# Altium PCB LPCB224R0.PcbDoc (part 2 of 2)
Units mm, origin at the board's own origin, x right, y up, seen from the top; angles counter-clockwise.
Board outline 139 x 166 mm, 4 copper layers (Top Layer, Internal Plane 1, Mid-Layer 1, Bottom Layer); 91 components, 73 nets, 403 pads, 171 vias.
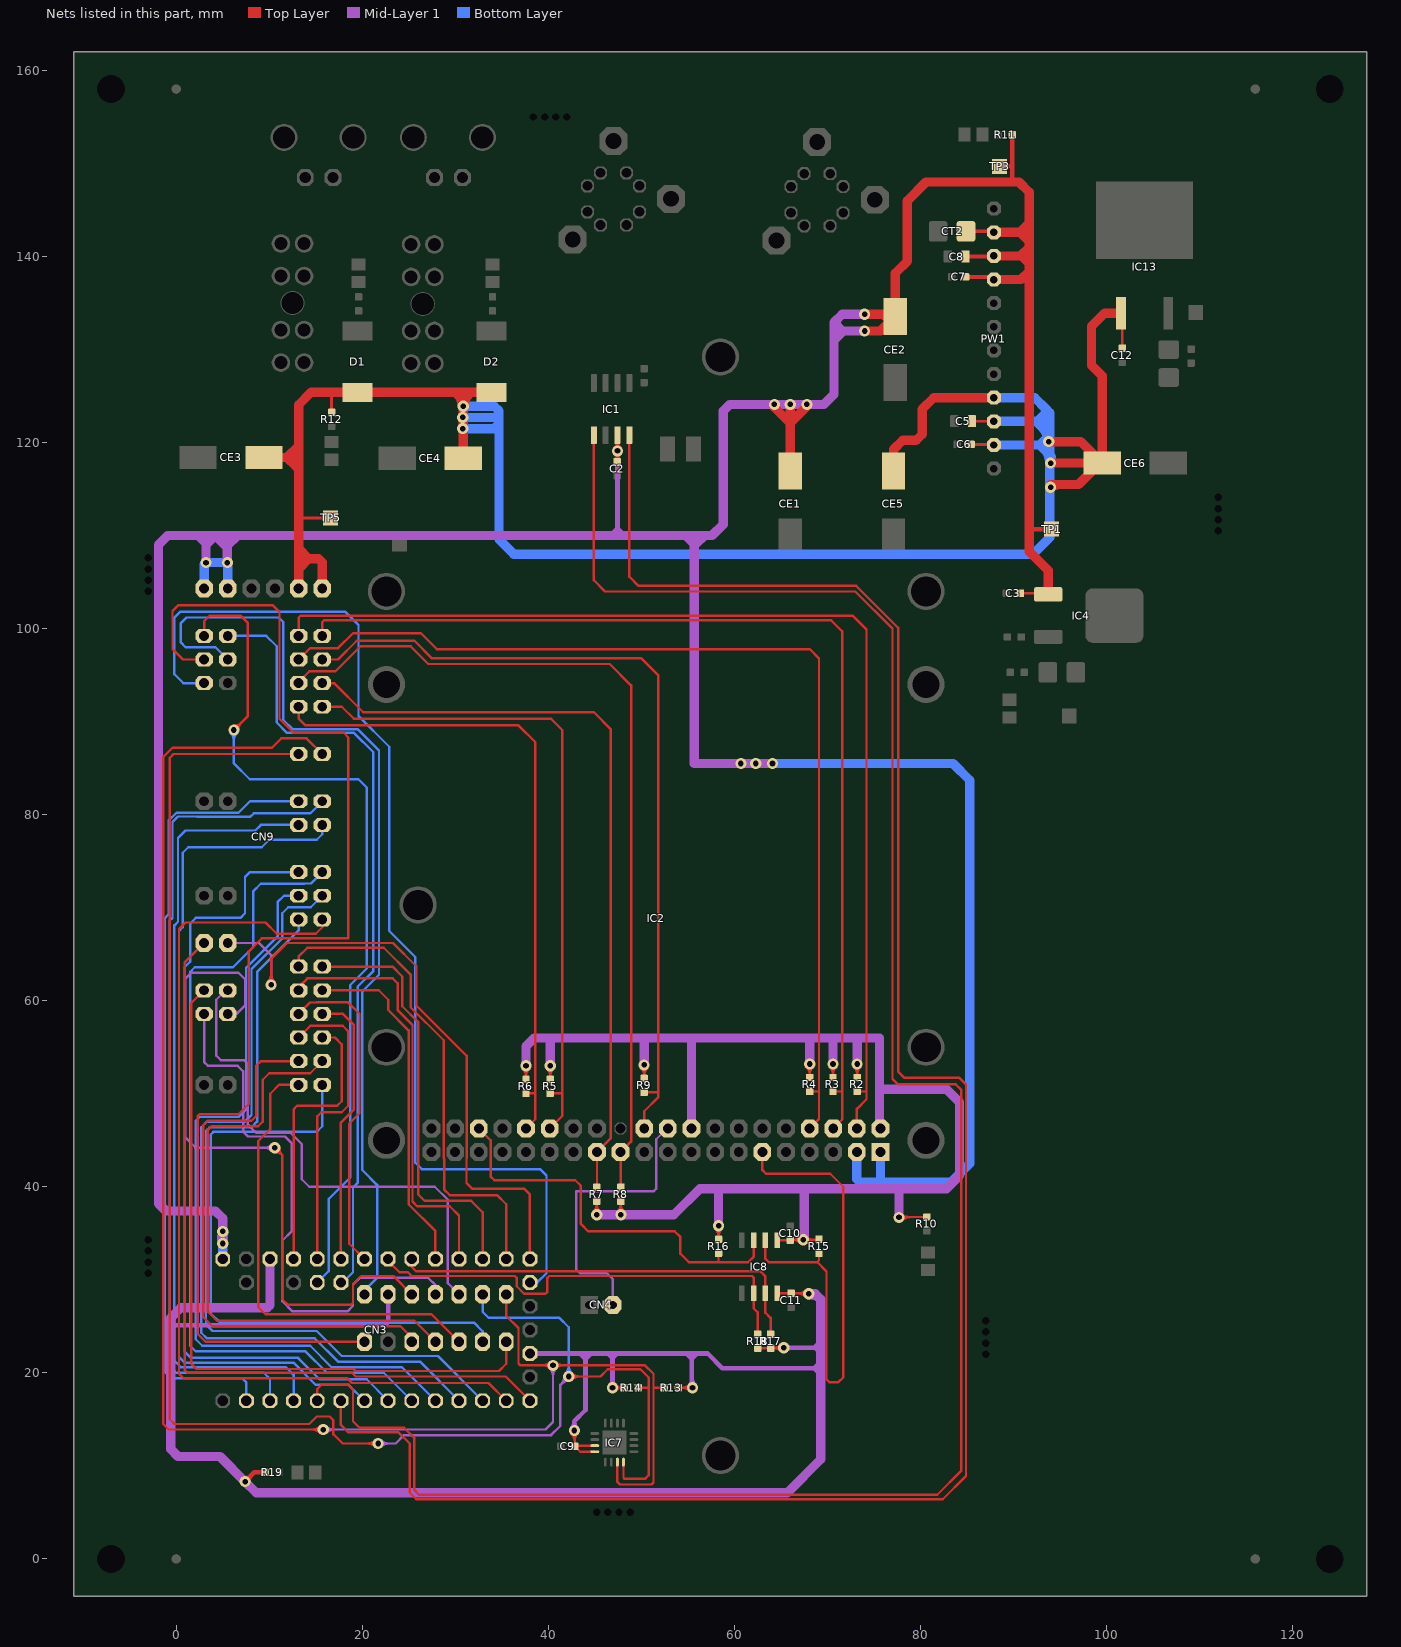
[diagram p4: the nets of this part, all layers, seen from the top]

## Via types
v1: diameter 1.2, hole 0.6, Top Layer to Bottom Layer, 171 vias

## Nets (pads, with @x,y where several pads share a name; then routed paths per layer and width w, separated by ;. In a path a pad name is that pad's centre, name@x,y a point inside that pad or via, vN(x,y) a via of type N, cw(c..) or ccw(c..) an arc to the next point about the centre after c; other vN are vias at no path point) (continued)
P5V: C2.1 C3.1 C7.1 C8.1 CE1.1 CE2.1 CN3.VIN CN9.P5V1 CN9.P5V2 CT2.1 IC1.3 IC2.2 IC2.4 IC4.1 PW1.9 PW1.10 PW1.11 R11.2 TP1.1 TP3.1 | length 480.3
  Top Layer w0.254: v1@47.101,119.439 ccw(c46.293,120.247) 47.435,120.247 ccw(c48.577,120.247) v1@47.769,119.439 ; v1@47.106,118.764 cw(c46.357,117.99) C2.1@47.435,117.99 ; C2.1@47.4,117.955 C2.1@47.435,117.99 ; IC1.3@47.435,120.805 v1(47.435,119.105) C2.1@47.435,117.99 ; v1@47.764,118.764 ccw(c48.513,117.99) C2.1@47.435,117.99
  Top Layer w0.3: C3.1@90.75,103.805 93.627,103.805 IC4.1@93.741,103.691
  Top Layer w0.4: C7.1@84.85,137.805 87.62,137.805 PW1.9@87.9,137.525 ; C8.1@84.85,140.005 87.84,140.005 PW1.10@87.9,140.065 ; CT2.1@84.9,142.705 87.8,142.705 PW1.11@87.9,142.605
  Top Layer w0.5: TP3.1@88.505,149.7 89.805,149.7 89.855,149.75 ; 89.8,148.005 89.855,148.059 89.855,149.75 ; R11.2@89.855,153.1 89.855,149.75 ; 91.66,140.065 91.7,140.065 ; 91.7,110.8 91.8,110.7 TP1.1@94.1,110.7 ; 91.7,146.905 91.891,147.095
  Top Layer w1: v1(64.3,124.1) 64.3,123.8 66,122.1 ; v1@64.4,124.1 ccw(c65.366,124.1) 64.683,123.417 ; CE1.1@66,116.955 66,122.1 ; v1(66,124.1) 66,122.1 ; v1(67.8,124.1) 67.8,123.9 66,122.1 ; v1(74,132) 75.7,132 CE2.1@77.255,133.555 ; v1(74,133.8) 76,133.8 76.245,133.555 CE2.1@77.255,133.555 ; PW1.9@87.9,137.525 90.82,137.525 91.7,138.405 ; PW1.10@87.9,140.065 90.76,140.065 ; PW1.11@87.9,142.605 90.7,142.605 ; IC4.1@93.741,103.691 93.741,106.259 91.7,108.3 91.7,110.8 91.7,138.405 ; CE2.1@77.255,133.555 CE2.1@77.3,133.555 77.3,138.2 78.6,139.5 78.6,146.005 80.6,148.005 89.8,148.005 90.6,148.005 91.7,146.905 91.7,143.605 ; 90.7,142.605 91.7,141.605 ; 90.7,142.605 91.6,142.605 91.7,142.505 ; 90.7,142.605 91.7,143.605 ; 90.76,140.065 90.89,140.065 ; 90.76,140.065 91.7,141.005 ; 90.89,140.065 91.66,140.065 91.7,140.105 ; 90.89,140.065 91.7,139.255 ; 91.7,138.405 91.7,139.255 ; 91.7,139.255 91.7,140.065 91.7,140.105 ; 91.7,140.105 91.7,141.005 ; 91.7,141.005 91.7,141.605 ; 91.7,141.605 91.7,142.505 ; 91.7,142.505 91.7,143.605
  Mid-Layer 1 w0.5: 46.6,110.005 46.67,110.005 47.435,110.77 ; v1@47.188,118.857 cw(c46.59,118.26) 47.435,118.26 cw(c48.28,118.26) v1@47.682,118.857 ; 47.4,110.005 47.435,110.04 47.435,110.77 ; v1(47.435,119.105) 47.435,110.77 ; 48.2,110.005 47.435,110.77
  Mid-Layer 1 w1: v1(3.2,107.105) 3.2,109.205 ; v1(5,33.905) v1(5,35.205) 5,36.605 4.2,37.405 -1.1,37.405 -1.9,38.205 -1.9,109.005 -0.9,110.005 2.4,110.005 ; v1(5.5,107.105) 5.5,108.905 ; 46.6,110.005 6.6,110.005 ; 46.67,110.005 47.4,110.005 48.2,110.005 54.8,110.005 ; v1(64.1,85.505) v1(62.3,85.505) v1(60.7,85.505) 55.7,85.505 55.7,109.005 ; v1(74,132) 71.7,132 ; v1(74,133.8) 71.6,133.8 70.7,132.9 ; 2.4,110.005 3.2,110.005 ; 2.4,110.005 3.2,109.205 ; 3.2,109.205 3.4,109.205 4.2,110.005 ; 3.2,109.205 3.2,110.005 ; 3.2,110.005 4.2,110.005 ; 4.2,110.005 5.3,108.905 5.5,108.905 ; 4.2,110.005 5.5,110.005 ; 5.5,108.905 6.6,110.005 ; 5.5,108.905 5.5,110.005 ; 5.5,110.005 6.6,110.005 ; 54.8,110.005 55.7,110.005 ; 54.8,110.005 55.7,109.105 ; 55.7,109.005 55.7,109.105 ; 55.7,109.005 55.8,109.005 56.8,110.005 ; 55.7,109.105 55.7,110.005 ; 55.7,110.005 56.8,110.005 ; 56.8,110.005 57.6,110.005 58.8,111.205 58.8,123.405 59.5,124.105 69.6,124.105 70.7,125.205 70.7,131 ; 70.7,131 70.7,131.9 ; 70.7,131 71.7,132 ; 70.7,131.9 70.7,132.9 ; 70.7,131.9 70.8,132 71.6,132 ; 70.7,132.9 71.6,132 ; 71.6,132 71.7,132
  Bottom Layer w1: CN9.P5V1@3,104.305 3,106.905 v1(3.2,107.105) 5.2,107.105 5.54,106.765 CN9.P5V2@5.54,104.305 ; 3,106.38 cw(c3.924,106.38) v1@3.271,107.034 ; CN3.VIN@5,32.24 5,34.905 v1@5.1,35.005 ; v1@5.074,33.972 cw(c5.63,34.475) v1@5.1,35.005 ; v1(60.7,85.505) v1(62.3,85.505) v1(64.1,85.505) 83.5,85.505 85.3,83.705 85.3,42.505 83.3,40.505 75.4,40.505 ; IC2.4@73.17,43.73 73.17,40.835 73.5,40.505 75.4,40.505 ; IC2.2@75.71,43.73 75.71,40.815 75.4,40.505
P24V: C5.1 C6.1 C12.1 CE3.1 CE4.1 CE5.1 CE6.1 CN9.P24V1 CN9.P24V2 D1.1 D2.1 IC13.1 PW1.2 PW1.3 PW1.4 R12.2 TP5.1 | length 276.8
  Top Layer w0.3: 13.16,111.905 TP5.1@16.6,111.905 ; R12.2@16.7,123.255 16.7,125.205 16.9,125.405 ; C6.1@85.45,119.805 87.84,119.805 PW1.2@87.9,119.745 ; C5.1@85.55,122.305 85.57,122.285 PW1.3@87.9,122.285 ; IC13.1@101.56,133.9 101.7,133.76 C12.1@101.7,130.15
  Top Layer w1: CE3.1@9.45,118.405 11.9,118.405 ; CN9.P24V1@13.16,104.305 13.16,106.405 ; 13.16,119.705 13.16,119.665 ; CN9.P24V2@15.7,104.305 15.7,107.105 15.3,107.505 14.26,107.505 ; 30.22,125.185 cw(c28.939,123.905) v1@30.75,123.905 ; CE4.1@30.85,118.305 v1(30.85,123.905) 30.85,124.555 ; v1@30.95,123.905 cw(c32.761,123.905) 31.48,125.185 ; D2.1@33.9,125.405 31.7,125.405 ; CE5.1@77.1,116.7 77.1,119.25 78.1,120.25 79.55,120.25 80.2,120.9 80.2,123.6 81.425,124.825 PW1.4@87.9,124.825 ; v1(93.8,120.1) 97.25,120.1 CE6.1@99.55,117.8 ; v1@94,115.5 97,115.5 CE6.1@99.3,117.8 ; v1(94,117.8) CE6.1@99.3,117.8 ; v1@94.071,115.129 cw(c94.966,114.234) 94.966,115.5 ; IC13.1@101.56,133.9 99.8,133.9 98.4,132.5 98.4,128.3 99.55,127.15 CE6.1@99.55,117.8 ; 11.9,118.405 12.9,117.405 13.16,117.405 ; 11.9,118.405 12.96,118.405 13.16,118.605 ; 11.9,118.405 13.16,119.665 ; 13.16,106.405 13.16,107.505 ; 13.16,106.405 14.26,107.505 ; 13.16,107.505 13.16,108.605 ; 13.16,107.505 14.26,107.505 ; 13.16,108.605 13.16,111.905 13.16,117.405 ; 13.16,108.605 14.26,107.505 ; 13.16,117.405 13.16,118.605 ; 13.16,118.605 13.16,119.665 ; 13.16,119.665 13.16,124.065 14.5,125.405 16.9,125.405 D1.1@19.5,125.405 30,125.405 ; 30,125.405 30.7,125.405 ; 30,125.405 30.85,124.555 ; 30.7,125.405 31.7,125.405 ; 30.7,125.405 30.85,125.255 30.85,124.555 ; 30.85,124.555 31.7,125.405 ; CE6.1@99.3,117.8 CE6.1@99.55,117.8
  Bottom Layer w1: v1(30.8,121.505) 34.2,121.505 34.7,122.005 ; v1(30.8,122.705) 34.7,122.705 ; v1(30.85,123.905) 34.2,123.905 34.7,123.405 34.7,122.005 ; PW1.2@87.9,119.745 92.84,119.745 ; PW1.3@87.9,122.285 92.5,122.285 ; PW1.4@87.9,124.825 92.28,124.825 93.5,123.605 ; 92.701,119.745 ccw(c92.701,121.199) v1@93.729,120.171 ; 93.06,121.644 cw(c91.516,120.1) v1@93.7,120.1 ; 93.26,119.344 cw(c91.716,117.8) v1@93.9,117.8 ; v1@93.776,120.003 ccw(c93.536,119.049) 92.84,119.745 ; v1@93.873,120.032 ccw(c94.578,119.382) 93.9,118.705 ; v1@93.925,117.866 ccw(c93.468,118.272) 93.9,118.705 ; 34.7,122.005 34.7,109.605 36.3,108.005 92.1,108.005 93.9,109.805 93.9,118.705 ; 92.5,122.205 92.58,122.285 ; 92.5,122.205 93.9,120.805 ; 92.5,122.205 92.5,122.285 ; 92.5,122.285 92.58,122.285 ; 92.58,122.285 93.88,122.285 93.9,122.305 ; 92.58,122.285 93.5,123.205 93.5,123.605 ; 92.84,119.745 ccw(c92.84,120.884) 93.723,120.163 cw(c92.84,120.884) 92.84,119.745 ; 92.84,119.745 92.86,119.745 ; 92.84,119.745 93.9,120.805 ; 92.86,119.745 ccw(c92.86,120.842) 93.722,120.162 cw(c92.86,120.842) 92.86,119.745 ; 92.86,119.745 93.74,119.745 v1@93.9,119.905 ; 92.86,119.745 93.9,118.705 ; 93.5,123.605 93.9,123.205 93.9,122.305 ; 93.9,118.705 v1@93.9,119.905 ; v1@93.9,119.905 93.9,120.805 ; 93.9,120.805 93.9,122.305
  other v1: 94,115.2
PI_D3V3: C10.1 IC2.1 IC2.17 IC8.1 R2.1 R3.1 R4.1 R5.1 R6.1 R7.1 R8.1 R9.1 R10.2 R15.2 R16.2 | length 187.5
  Top Layer w0.254: v1@37.266,52.67 cw(c36.458,51.863) 37.6,51.863 cw(c38.742,51.863) v1@37.934,52.67 ; R6.1@37.6,51.55 v1(37.6,53.005) ; v1@39.866,52.67 cw(c39.058,51.863) 40.2,51.863 cw(c41.342,51.863) v1@40.534,52.67 ; R5.1@40.2,51.55 v1(40.2,53.005) ; v1@44.866,37.33 ccw(c44.058,38.137) 45.2,38.137 ccw(c46.342,38.137) v1@45.534,37.33 ; v1(45.2,36.995) R7.1@45.2,38.45 ; v1@47.466,37.33 ccw(c46.658,38.137) 47.8,38.137 ccw(c48.942,38.137) v1@48.134,37.33 ; v1(47.8,36.995) R8.1@47.8,38.45 ; v1@49.966,52.77 cw(c49.158,51.963) 50.3,51.963 cw(c51.442,51.963) v1@50.634,52.77 ; R9.1@50.3,51.65 v1(50.3,53.105) ; v1@57.966,35.47 cw(c57.158,34.663) 58.3,34.663 cw(c59.442,34.663) v1@58.634,35.47 ; R16.2@58.3,34.355 v1(58.3,35.805) ; IC8.1@64.605,34.255 C10.1@66,34.255 66.05,34.305 v1(67.4,34.305) 69.05,34.305 R15.2@69.1,34.355 ; v1@67.066,33.97 ccw(c66.258,33.163) 66.258,34.305 ccw(c66.258,35.447) v1@67.066,34.639 ; v1@67.734,33.97 cw(c68.542,33.163) 68.542,34.305 cw(c68.542,35.447) v1@67.734,34.639 ; v1@67.766,52.87 cw(c66.958,52.063) 68.1,52.063 cw(c69.242,52.063) v1@68.434,52.87 ; R4.1@68.1,51.75 v1(68.1,53.205) ; v1@70.266,52.87 cw(c69.458,52.063) 70.6,52.063 cw(c71.742,52.063) v1@70.934,52.87 ; R3.1@70.6,51.75 v1(70.6,53.205) ; v1@72.866,52.87 cw(c72.058,52.063) 73.2,52.063 cw(c74.342,52.063) v1@73.534,52.87 ; R2.1@73.2,51.75 v1(73.2,53.205) ; v1(77.7,36.705) 77.75,36.755 R10.2@80.7,36.755 ; v1@77.855,36.55 cw(c78.349,36.055) 78.349,36.755 ; v1@78.034,36.37 cw(c78.963,35.442) 78.963,36.755 ; v1@78.034,37.039 ccw(c78.721,37.726) 78.721,36.755
  Mid-Layer 1 w1: v1(37.6,53.005) 37.6,55.105 38.5,56.005 40.2,56.005 ; v1(40.2,53.005) 40.2,56.005 ; v1(45.2,36.995) v1(47.8,36.995) 53.491,36.995 56.3,39.805 58.3,39.805 ; v1(50.3,53.105) 50.3,56.005 ; IC2.17@55.39,46.27 55.4,46.28 55.4,56.005 ; v1(58.3,35.805) 58.3,39.805 ; v1(67.4,34.305) 67.5,34.405 67.5,39.805 ; v1(68.1,53.205) 68.1,56.005 ; v1(70.6,53.205) 70.6,56.005 ; v1(73.2,53.205) 73.2,56.005 ; IC2.1@75.71,46.27 75.6,46.38 75.6,50.5 ; v1(77.7,36.705) 77.7,39.805 ; 40.2,56.005 50.3,56.005 ; 50.3,56.005 55.4,56.005 ; 55.4,56.005 68.1,56.005 ; 58.3,39.805 67.5,39.805 ; 67.5,39.805 77.7,39.805 ; 68.1,56.005 70.6,56.005 ; 70.6,56.005 73.2,56.005 ; 73.2,56.005 75.6,56.005 75.6,50.5 ; 75.6,50.5 82.8,50.5 84.2,49.1 84.2,41.205 82.8,39.805 77.7,39.805
PI_ID1: CN9.ID1 IC2.3 R2.2 | length 118.8
  Top Layer w0.254: CN9.ID1@13.16,99.225 13.16,101.165 13.4,101.405 72.7,101.405 74.2,99.905 74.2,50.205 ; IC2.3@73.17,46.27 73.17,48.375 74.2,49.405 74.2,50.205 ; R2.2@73.2,50.25 74.155,50.25 74.2,50.205
PI_ID2: CN9.ID2 IC2.5 R3.2 | length 112.8
  Top Layer w0.254: CN9.ID2@15.7,99.225 15.7,100.705 15.9,100.905 70.4,100.905 71.6,99.705 71.6,50.305 ; R3.2@70.6,50.25 71.545,50.25 71.6,50.305 ; IC2.5@70.63,46.27 71.6,47.24 71.6,50.305
PI_ID3: CN9.ID3 IC2.7 R4.2 | length 110.6
  Top Layer w0.254: CN9.ID3@13.16,96.685 13.18,96.685 14.4,97.905 17.4,97.905 19,99.505 26.3,99.505 28,97.805 ; 28.4,97.805 28,97.805 ; IC2.7@68.09,46.27 69.1,47.28 69.1,50.305 ; R4.2@68.1,50.25 69.045,50.25 69.1,50.305 ; 28,97.805 68.1,97.805 69.1,96.805 69.1,50.305
PI_ID4: CN9.ID4 IC2.29 R5.2 | length 71.5
  Top Layer w0.254: CN9.ID4@15.7,91.605 17.8,91.605 19.1,90.305 40.3,90.305 41.5,89.105 41.5,50.005 ; IC2.29@40.15,46.27 41.5,47.62 41.5,50.005 ; R5.2@40.2,50.05 41.455,50.05 41.5,50.005
PI_ID5: CN9.ID5 IC2.31 R6.2 | length 70.7
  Top Layer w0.254: CN9.ID5@13.16,91.605 13.16,90.345 13.9,89.605 36.8,89.605 38.6,87.805 38.6,50.005 ; R6.2@37.6,50.05 38.555,50.05 38.6,50.005 ; IC2.31@37.61,46.27 38.6,47.26 38.6,50.005
PI_ID6: CN9.ID6 IC2.26 R7.2 | length 82.9
  Top Layer w0.254: CN9.ID6@15.7,94.145 16.96,94.145 20.1,91.005 44.9,91.005 46.7,89.205 46.7,45.2 IC2.26@45.23,43.73 45.23,39.98 R7.2@45.2,39.95
PI_ID7: CN9.ID7 IC2.24 R8.2 | length 93.6
  Top Layer w0.254: CN9.ID7@13.16,94.145 13.16,94.265 14.3,95.405 17.1,95.405 19.8,98.105 25.2,98.105 27.1,96.205 46.6,96.205 48.9,93.905 48.9,44.86 IC2.24@47.77,43.73 47.77,39.98 R8.2@47.8,39.95
PI_ID8: CN9.ID8 IC2.21 R9.2 | length 89.3
  Top Layer w0.254: CN9.ID8@15.7,96.685 17.38,96.685 19.4,98.705 25.6,98.705 27.5,96.805 50,96.805 51.8,95.005 51.8,50.205 ; R9.2@50.3,50.15 51.745,50.15 51.8,50.205 ; IC2.21@50.31,46.27 50.31,48.115 51.8,49.605 51.8,50.205
PI_SCL: IC2.35 IC8.3 R16.1 | length 44.2
  Top Layer w0.254: IC2.35@32.53,46.27 33.8,45 33.8,41.105 34.2,40.705 42.9,40.705 43.5,40.105 43.5,36.005 44.3,35.205 53.6,35.205 54.2,34.605 54.2,32.805 55.1,31.905 58.3,31.905 ; R16.1@58.3,32.855 58.3,31.905 ; IC8.3@62.065,34.255 62.065,32.47 61.5,31.905 58.3,31.905
PI_SDA: IC2.12 IC8.2 R15.1 | length 55.7
  Top Layer w0.254: IC2.12@63.01,43.73 63.01,41.795 63.4,41.405 70.3,41.405 71.7,40.005 71.7,19.505 71.2,19.005 70.2,19.005 69.9,19.305 69.9,30.905 68.9,31.905 ; IC8.2@63.335,34.255 63.335,32.27 63.7,31.905 68.9,31.905 ; R15.1@69.1,32.855 69.1,32.105 68.9,31.905
T_D3V3: C9.1 C11.1 CN3.3V3_1 CN3.3V3_2 CN3.3V3_3 IC7.15 IC7.16 IC8.8 R13.2 R14.2 R17.2 R18.2 R19.2 | length 245.8
  Top Layer w0.254: v1@42.466,13.47 cw(c41.537,12.542) 42.85,12.542 ; v1@42.645,13.65 cw(c42.151,13.155) 42.85,13.155 ; v1(42.8,13.805) 42.85,13.755 C9.1@42.85,12.105 ; 42.85,12.783 cw(c43.821,12.783) v1@43.134,13.47 ; IC7.16@45,11.525 43.43,11.525 C9.1@42.85,12.105 ; IC7.15@45,12.175 42.92,12.175 C9.1@42.85,12.105 ; v1(46.9,18.405) R14.2@48.15,18.405 ; v1@47.234,18.07 cw(c48.042,17.263) 48.042,18.405 cw(c48.042,19.547) v1@47.234,18.739 ; R13.2@53.95,18.405 v1(55.5,18.405) ; v1@55.166,18.07 ccw(c54.358,17.263) 54.358,18.405 ccw(c54.358,19.547) v1@55.166,18.739 ; R18.2@62.5,22.655 R17.2@63.9,22.655 v1@65.3,22.655 ; R17.2@64.037,22.655 ccw(c64.037,23.967) v1@64.966,23.039 ; R17.2@64.279,22.655 cw(c64.279,21.683) v1@64.966,22.37 ; IC8.8@64.605,28.555 C11.1@66.1,28.555 67.45,28.555 v1@67.6,28.405 ; 64.651,22.655 ccw(c64.651,23.354) v1@65.145,22.859 ; 66.737,28.555 cw(c66.737,27.242) v1@67.666,28.17 ; 66.979,28.555 ccw(c66.979,29.526) v1@67.666,28.839 ; 67.351,28.555 cw(c67.351,27.855) v1@67.845,28.35
  Top Layer w0.5: v1(7.4,8.305) 8.4,9.305 R19.2@9.55,9.305 ; v1@7.4,8.655 ccw(c7.4,9.5) 7.997,8.902 ccw(c8.595,8.305) v1@7.75,8.305
  Mid-Layer 1 w0.5: -0.6,25.205 -0.5,25.105 22.4,25.105 22.78,25.485 CN3.3V3_3@22.78,28.43 ; CN3.3V3_2@38.02,22.08 43.4,22.08 ; v1@42.553,14.052 ccw(c41.955,14.65) 42.8,14.65 ccw(c43.645,14.65) v1@43.047,14.052 ; v1(42.8,13.805) 42.8,14.805 44,16.005 44,21.48 ; v1@46.653,18.652 ccw(c46.055,19.25) 46.9,19.25 ccw(c47.745,19.25) v1@47.147,18.652 ; v1(46.9,18.405) 46.9,21.58 ; v1@55.253,18.652 ccw(c54.896,19.008) 55.4,19.008 ; 55.4,19.491 ccw(c56.586,19.491) v1@55.747,18.652 ; v1(55.5,18.405) 55.4,18.505 55.4,21.505 ; v1(65.3,22.705) 68.6,22.705 ; v1@65.547,22.457 cw(c66.145,21.86) 66.145,22.705 cw(c66.145,23.55) v1@65.547,22.952 ; 69.3,19.805 68.6,20.505 ; 69.3,20.505 68.6,20.505 ; 69.3,21.205 68.6,20.505 ; 69.3,22.105 68.7,22.705 ; 69.3,22.705 68.7,22.705 ; 69.3,23.405 68.6,22.705 ; 43.4,22.08 44,22.08 ; 43.4,22.08 44,21.48 ; 44,21.48 44,22.08 ; 44,21.48 44.6,22.08 ; 44,22.08 44.6,22.08 ; 44.6,22.08 46.4,22.08 ; 46.4,22.08 46.9,22.08 ; 46.4,22.08 46.9,21.58 ; 46.9,21.58 47.4,22.08 ; 46.9,21.58 46.9,22.08 ; 46.9,22.08 47.4,22.08 ; 47.4,22.08 54.825,22.08 ; 54.825,22.08 55.4,22.08 ; 54.825,22.08 55.4,21.505 ; 55.4,21.505 55.425,21.505 56,22.08 ; 55.4,21.505 55.4,22.08 ; 55.4,22.08 56,22.08 ; 56,22.08 57.125,22.08 58.7,20.505 68.6,20.505 ; 68.6,22.705 68.7,22.705
  Mid-Layer 1 w1: CN3.3V3_1@10.08,32.24 10.08,27.285 9.8,27.005 0.5,27.005 -0.6,25.905 -0.6,25.205 -0.6,11.805 0.2,11.005 4.7,11.005 v1(7.4,8.305) 8.6,7.105 65.7,7.105 69.3,10.705 69.3,19.805 69.3,20.505 69.3,21.205 69.3,22.105 69.3,22.705 69.3,23.405 69.3,27.905 ; v1(68,28.505) 68.7,28.505 69.3,27.905 ; v1@68.005,28.405 cw(c68.088,26.693) 69.3,27.905
TEENSY_A10: CN3.A10 CN9.A10 | length 97
  Top Layer w0.254: CN9.A10@3,99.225 3,100.805 3.6,101.405 6.9,101.405 7.7,100.605 7.7,90.605 v1(6.2,89.105) ; v1@6.2,89.578 ccw(c6.2,90.72) 7.007,89.912 ccw(c7.815,89.105) v1@6.673,89.105
  Bottom Layer w0.254: v1@5.866,88.77 cw(c5.058,87.963) 6.2,87.963 cw(c7.342,87.963) v1@6.534,88.77 ; v1(6.2,89.105) 6.2,85.505 7.9,83.805 19.6,83.805 20.5,82.905 20.5,63.5 18.7,61.7 18.7,41.005 16.4,38.705 16.4,30.94 CN3.A10@15.16,29.7
TEENSY_A11: CN3.A11 CN9.A11 | length 84.2
  Bottom Layer w0.254: CN9.A11@5.54,99.225 9.68,99.225 10.8,98.105 10.8,89.905 11.914,88.791 19.114,88.791 21.2,86.705 21.2,63.2 19.5,61.5 19.5,40.405 19,39.905 19,30.805 17.895,29.7 CN3.A11@17.7,29.7
TEENSY_A12: CN3.A12 CN9.A12 | length 136.7
  Top Layer w0.254: CN9.A12@3,96.685 0.72,96.685 -0.4,97.805 -0.4,101.905 0.2,102.505 10.4,102.505 11.1,101.805 11.1,90.305 12.6,88.805 18,88.805 18.5,88.305 18.5,66.705 9.2,66.705 7.8,65.305 7.8,48.905 6.7,47.805 2.5,47.805 2.3,47.605 2.3,24.205 3.155,23.35 CN3.A12@20.24,23.35
TEENSY_A13: CN3.A13 CN9.A13 | length 102
  Bottom Layer w0.254: CN9.A13@5.54,96.685 4.22,98.005 3.615,98.005 3.595,97.985 1.02,97.985 0.5,98.505 0.5,100.605 1.1,101.205 11,101.205 11.5,100.705 11.5,90.205 12.5,89.205 19.5,89.205 21.8,86.905 21.8,62.8 20,61 20,41.805 21.6,40.205 21.6,30.205 20.24,28.845 CN3.A13@20.24,28.43
TEENSY_A14: CN3.A14 CN9.A14 | length 118
  Bottom Layer w0.254: CN9.A14@3,94.145 0.76,94.145 -0.2,95.105 -0.2,101.205 0.4,101.805 18.2,101.805 19.6,100.405 19.6,90.605 22.9,87.305 22.9,67.505 25.7,64.705 25.7,42.605 26.4,41.905 39.1,41.905 39.8,41.205 39.8,30.705 38.795,29.7 CN3.A14@38.02,29.7
TEENSY_CAN_RX: CN3.4 IC1.4 | length 221.3
  Top Layer w0.254: CN3.4@17.7,17 17.7,14.405 18.5,13.605 23.9,13.605 25.1,12.405 25.1,7.105 25.8,6.405 82.4,6.405 84.9,8.905 84.9,51.005 84.2,51.705 78.3,51.705 77.6,52.405 77.6,100.1 73.1,104.6 49.7,104.6 48.705,105.595 IC1.4@48.705,120.805
TEENSY_CAN_TX: CN3.3 IC1.1 | length 229
  Top Layer w0.254: CN3.3@15.16,17 15.16,18.265 15.6,18.705 18.5,18.705 19,18.205 19,14.805 19.7,14.105 24.5,14.105 25.6,13.005 25.6,7.405 26.1,6.905 81.8,6.905 84.4,9.505 84.4,50.405 83.8,51.005 77.6,51.005 77,51.605 77,100 73,104 46.1,104 44.895,105.205 IC1.1@44.895,120.805
TEENSY_PROG: CN4.2 IC2.19 | length 31.3
  Mid-Layer 1 w0.254: CN4.2@46.94,27.3 46.94,30.065 46.3,30.705 43.4,30.705 43,31.105 43,39.505 51.3,39.505 51.6,39.805 51.6,45.105 52.765,46.27 IC2.19@52.85,46.27
TEENSY_SCL: CN3.29 CN9.SCL IC7.3 R13.1 | length 189.9
  Top Layer w0.254: v1@15.466,13.57 ccw(c14.658,12.763) 14.658,13.905 ccw(c14.658,15.047) v1@15.466,14.239 ; CN9.SCL@15.7,86.525 14.02,88.205 11.3,88.205 10.3,87.205 -0.4,87.205 -1.4,86.205 -1.4,14.505 -0.8,13.905 v1(15.8,13.905) ; CN3.29@35.48,28.43 35.48,26.125 36.8,24.805 36.8,21.005 37,20.805 50.4,20.805 51.3,19.905 51.3,18.405 ; v1@40.166,20.47 ccw(c39.358,19.663) 39.358,20.805 ccw(c39.358,21.947) v1@40.166,21.139 ; v1@40.834,20.47 cw(c41.642,19.663) 41.642,20.805 cw(c41.642,21.947) v1@40.834,21.139 ; IC7.3@47.425,10.4 47.425,8.28 47.7,8.005 51.1,8.005 51.3,8.205 51.3,18.405 ; R13.1@52.45,18.405 51.3,18.405
  Mid-Layer 1 w0.254: v1(15.8,13.905) 39.7,13.905 40.5,14.705 v1@40.5,20.905 ; v1@16.134,13.57 cw(c16.942,12.763) 16.942,13.905 cw(c16.942,15.047) v1@16.134,14.239 ; v1@40.166,20.47 cw(c39.358,19.663) 40.5,19.663 cw(c41.642,19.663) v1@40.834,20.47
  other v1: 40.5,20.805
TEENSY_SCL1: CN3.19 IC8.6 R18.1 | length 49.5
  Top Layer w0.254: CN3.19@22.78,32.24 22.78,32.025 24,30.805 24.9,30.805 25.3,30.405 36.4,30.405 36.6,30.205 36.6,29.305 37.4,28.505 39.7,28.505 39.9,28.705 39.9,30.205 40.1,30.405 61.9,30.405 62.065,30.24 62.065,29.64 IC8.6@62.065,28.555 62.065,26.94 62.5,26.505 R18.1@62.5,24.155
TEENSY_SDA: CN3.30 CN9.SDA IC7.4 R14.1 | length 187.8
  Top Layer w0.254: CN9.SDA@13.16,86.525 -0.28,86.525 -0.7,86.105 -0.7,15.005 -0.2,14.505 14.3,14.505 15.1,15.305 16.5,15.305 16.9,14.905 16.9,13.405 17.9,12.405 v1(21.7,12.405) ; v1@21.366,12.07 ccw(c20.558,11.263) 20.558,12.405 ccw(c20.558,13.547) v1@21.366,12.739 ; v1(42.2,19.605) 45.6,19.605 46.386,20.391 49.914,20.391 50.8,19.505 50.8,18.405 ; v1@42.534,19.27 cw(c43.342,18.463) 43.342,19.605 cw(c43.342,20.747) v1@42.534,19.939 ; IC7.4@48.075,10.4 48.075,8.73 48.2,8.605 50.4,8.605 50.8,9.005 50.8,18.405 ; R14.1@49.65,18.405 50.8,18.405
  Mid-Layer 1 w0.254: v1(21.7,12.405) 23.6,12.405 24.5,13.305 40.3,13.305 41.3,14.305 41.3,18.705 v1(42.2,19.605) ; v1@22.034,12.07 cw(c22.842,11.263) 22.842,12.405 cw(c22.842,13.547) v1@22.034,12.739 ; v1@41.727,19.605 cw(c40.585,19.605) 41.393,18.797 cw(c42.2,17.99) v1@42.2,19.132
  Bottom Layer w0.254: CN3.30@32.94,28.43 32.94,26.565 33.6,25.905 41.2,25.905 42.2,24.905 v1(42.2,19.605) ; v1@41.866,19.939 ccw(c41.058,20.747) 42.2,20.747 ccw(c43.342,20.747) v1@42.534,19.939
TEENSY_SDA1: CN3.18 IC8.7 R17.1 | length 45.7
  Top Layer w0.254: CN3.18@25.32,32.24 25.32,31.385 25.8,30.905 62.8,30.905 62.9,30.805 63.335,30.37 IC8.7@63.335,28.555 63.335,26.47 63.9,25.905 R17.1@63.9,24.155
TEENSY_T0: CN3.0 CN9.T0 | length 85.5
  Bottom Layer w0.254: CN3.0@7.54,17 7.54,18.965 7.1,19.405 -0.5,19.405 -1.2,20.105 -1.2,68.905 -0.814,69.291 -0.814,79.376 0.029,80.219 2.391,80.219 2.405,80.205 6.701,80.205 7.94,81.445 CN9.T0@13.16,81.445
TEENSY_T1: CN3.1 CN9.T1 | length 89.3
  Bottom Layer w0.254: CN3.1@10.08,17 10.08,19.325 9.4,20.005 0,20.005 -0.7,20.705 -0.7,68.605 -0.4,68.905 -0.4,79.205 0.2,79.805 2.22,79.805 2.233,79.791 7.987,79.791 8.34,80.144 14.4,80.144 CN9.T1@15.7,81.445
TEENSY_T2: CN3.2 CN9.T2 | length 86.1
  Bottom Layer w0.254: CN3.2@12.62,17 12.62,19.785 11.8,20.605 0.5,20.605 -0.2,21.305 -0.2,68.105 0.186,68.491 0.186,77.491 1,78.305 8.5,78.305 9.1,78.905 CN9.T2@13.16,78.905
TEENSY_T5: CN3.5 CN9.T5 | length 93.1
  Bottom Layer w0.254: CN9.T5@15.7,78.905 15.7,77.905 15.1,77.305 10,77.305 9.2,76.505 1.3,76.505 0.7,75.905 0.7,67.905 0.3,67.505 0.3,21.705 0.9,21.105 12.6,21.105 15,18.705 18.535,18.705 CN3.5@20.24,17
TEENSY_T6: CN3.6 CN9.T6 | length 86.6
  Bottom Layer w0.254: CN9.T6@13.16,73.825 7.92,73.825 7.4,73.305 7.4,69.405 6.9,68.905 2.1,68.905 1.5,68.305 1.5,64.205 0.9,63.605 0.9,22.305 1.6,21.605 13.1,21.605 15.4,19.305 20.475,19.305 CN3.6@22.78,17
TEENSY_T7: CN3.7 CN9.T7 | length 88.6
  Bottom Layer w0.254: CN9.T7@15.7,73.825 14.48,72.605 13.775,72.605 13.755,72.585 9.081,72.585 8.3,71.805 8.3,65.805 6.1,63.605 2,63.605 1.5,63.105 1.5,22.905 2.1,22.305 13.9,22.305 16.2,20.005 22.315,20.005 CN3.7@25.32,17
TEENSY_T8: CN3.8 CN9.T8 | length 84.1
  Bottom Layer w0.254: CN9.T8@13.16,71.285 11.58,71.285 10.9,70.605 10.9,66.905 7.5,63.505 7.5,48.305 6.7,47.505 2.5,47.505 2.1,47.105 2.1,23.605 2.8,22.905 14.4,22.905 16.7,20.605 24.255,20.605 CN3.8@27.86,17
TEENSY_T9: CN3.9 CN9.T9 | length 86.9
  Bottom Layer w0.254: CN9.T9@15.7,71.285 14.461,70.045 12.041,70.045 11.4,69.405 11.4,66.705 8.1,63.405 8.1,47.705 7.4,47.005 3.3,47.005 2.7,46.405 2.7,24.305 3.3,23.705 14.9,23.705 17.4,21.205 26.195,21.205 CN3.9@30.4,17
TEENSY_T10: CN3.10 CN9.T10 | length 83.4
  Bottom Layer w0.254: CN9.T10@13.16,68.745 13.16,67.565 8.7,63.105 8.7,47.005 8.1,46.405 3.6,46.405 3.2,46.005 3.2,25.205 3.9,24.505 15.1,24.505 17.8,21.805 28.135,21.805 CN3.10@32.94,17
TEENSY_T11: CN3.11 CN9.T11 | length 101.5
  Top Layer w0.254: CN9.T11@15.7,68.745 15.7,67.905 15,67.205 10.8,67.205 9.6,68.405 1,68.405 0.3,67.705 0.3,19.905 0.8,19.405 18.4,19.405 18.9,18.905 33.575,18.905 CN3.11@35.48,17
TEENSY_T12: CN3.12 CN9.T12 | length 85.3
  Top Layer w0.254: CN9.T12@3,66.205 0.9,64.105 0.9,20.305 1.2,20.005 18.9,20.005 19.3,19.605 35.415,19.605 CN3.12@38.02,17
TEENSY_T13: CN3.13 CN9.T13 | length 72
  Top Layer w0.254: v1@9.866,62.039 ccw(c9.058,62.847) 10.2,62.847 ccw(c11.342,62.847) v1@10.534,62.039 ; v1(10.2,61.705) 10.2,64.505 11.9,66.205 23.3,66.205 25.8,63.705 25.8,59.5 31.229,54.071 31.229,43.105 31.2,43.076 31.2,40.405 31.8,39.805 37.4,39.805 38.02,39.185 CN3.13@38.02,32.24
  Mid-Layer 1 w0.254: CN9.T13@5.54,66.205 8.9,66.205 10.2,64.905 v1(10.2,61.705) ; v1@9.866,62.039 ccw(c9.058,62.847) 10.2,62.847 ccw(c11.342,62.847) v1@10.534,62.039
TEENSY_T14: CN3.14 CN9.T14 | length 52.5
  Top Layer w0.254: CN9.T14@13.16,63.665 13.16,64.765 14.1,65.705 22.3,65.705 25.2,62.805 25.2,59.3 28.75,55.75 28.75,43.085 28.8,43.036 28.8,39.705 29.4,39.105 34.5,39.105 35.48,38.125 CN3.14@35.48,32.24
TEENSY_T15: CN3.15 CN9.T15 | length 45.9
  Top Layer w0.254: CN9.T15@15.7,63.665 23.24,63.665 24.3,62.605 24.3,59.4 26,57.7 26,39.205 26.7,38.505 31.7,38.505 32.94,37.265 CN3.15@32.94,32.24
TEENSY_T16: CN3.16 CN9.T16 | length 46
  Top Layer w0.254: CN9.T16@13.16,61.125 13.16,61.465 14.1,62.405 23.286,62.405 23.8,61.891 23.8,59 25.4,57.4 25.4,38.405 25.9,37.905 29.4,37.905 30.4,36.905 CN3.16@30.4,32.24
TEENSY_T17: CN3.17 CN9.T17 | length 37.5
  Top Layer w0.254: CN9.T17@15.7,61.125 21.78,61.125 22.8,60.105 22.8,59 24.986,56.814 24.986,38.119 27.86,35.245 CN3.17@27.86,32.24
TEENSY_T20: CN3.20 CN9.T20 | length 35.1
  Top Layer w0.254: CN9.T20@13.16,58.585 14.38,59.805 15.085,59.805 15.105,59.824 18.481,59.824 19.7,58.605 19.7,47.905 18.6,46.805 18.6,33.88 CN3.20@20.24,32.24
TEENSY_T21: CN3.21 CN9.T21 | length 29.6
  Top Layer w0.254: CN9.T21@15.7,58.585 17.92,58.585 19.1,57.405 19.1,48.305 17.7,46.905 CN3.21@17.7,32.24
TEENSY_T22: CN3.22 CN9.T22 | length 33.2
  Top Layer w0.254: CN9.T22@13.16,56.045 14.42,57.305 17.9,57.305 18.5,56.705 18.5,48.705 17.8,48.005 15.6,48.005 15.16,47.565 CN3.22@15.16,32.24
TEENSY_T23: CN3.23 CN9.T23 | length 30.1
  Top Layer w0.254: CN3.23@12.62,32.24 12.62,48.325 13,48.705 17.3,48.705 17.8,49.205 17.8,55.305 17.06,56.045 CN9.T23@15.7,56.045
TEENSY_T24: CN3.24 CN9.T24 | length 60.7
  Top Layer w0.254: CN9.T24@13.16,53.505 9.1,53.505 8.6,53.005 8.6,47.605 8.1,47.105 3.4,47.105 2.9,46.605 2.9,26.005 3.9,25.005 24.1,25.005 25.32,23.785 CN3.24@25.32,23.35
TEENSY_T25: CN3.25 CN9.T25 | length 63.3
  Top Layer w0.254: CN9.T25@15.7,53.505 14.4,52.205 10,52.205 9.3,51.505 9.3,47.005 8.8,46.505 3.8,46.505 3.4,46.105 3.4,26.605 4.4,25.605 25.605,25.605 CN3.25@27.86,23.35
TEENSY_T26: CN3.26 CN9.T26 | length 50.1
  Top Layer w0.254: CN9.T26@13.16,50.965 11.06,50.965 10.1,50.005 10.1,46.205 8.8,44.905 8.8,27.105 9.6,26.305 27.445,26.305 CN3.26@30.4,23.35
TEENSY_T27: CN3.27 CN9.T27 | length 67.2
  Bottom Layer w0.254: CN9.T27@15.7,50.965 15.7,46.505 15.1,45.905 4,45.905 3.7,45.605 3.7,26.405 4.7,25.405 32,25.405 32.94,24.465 CN3.27@32.94,23.35
TEENSY_T28: CN3.28 CN9.T28 | length 77.6
  Top Layer w0.254: CN9.T28@3,61.125 1.6,59.725 1.6,21.005 2.186,20.419 19.071,20.419 19.285,20.205 34.7,20.205 35.48,20.985 CN3.28@35.48,23.35
TEENSY_T31: CN3.31 CN9.T31 | length 55.7
  Mid-Layer 1 w0.254: CN9.T31@5.54,61.125 5.32,61.125 4.301,60.105 4.301,54.104 4.8,53.605 7.3,53.605 7.7,53.205 7.7,46.705 8.586,45.819 12.286,45.819 13.5,44.605 13.5,40.805 14.3,40.005 27.8,40.005 29.2,38.605 29.2,29.63 CN3.31@30.4,28.43
TEENSY_T32: CN3.32 CN9.T32 | length 60.5
  Mid-Layer 1 w0.254: CN9.T32@3,58.585 3,53.405 3.4,53.005 6.6,53.005 7.2,52.405 7.2,45.905 7.7,45.405 11.7,45.405 12.4,44.705 12.4,35.205 11.4,34.205 11.4,27.705 12.5,26.605 18.4,26.605 19,27.205 19,29.505 19.7,30.205 27.1,30.205 27.86,29.445 CN3.32@27.86,28.43
TEENSY_T33: CN3.33 CN9.T33 | length 76.8
  Top Layer w0.254: v1(10.6,44.205) 11.4,43.405 ; v1@10.603,43.732 cw(c10.611,42.615) 11.4,43.405 ; v1@11.073,44.201 ccw(c12.189,44.194) 11.4,43.405 ; CN3.33@25.32,28.43 23.345,30.405 19.9,30.405 19,29.505 19,27.505 18.8,27.305 12,27.305 11.4,27.905 11.4,43.405
  Mid-Layer 1 w0.254: CN9.T33@5.54,58.585 6.48,58.585 7.4,59.505 7.4,62.305 6.7,63.005 1.6,63.005 1,62.405 1,45.305 2.1,44.205 v1(10.6,44.205) ; v1@10.266,43.87 ccw(c9.458,43.063) 9.458,44.205 ccw(c9.458,45.347) v1@10.266,44.539
pads on no net: CN1.3 CN1.4 CN1.5 CN1.6 CN1.B CN2.3 CN2.4 CN2.5 CN2.6 CN2.B CN3.AREF CN3.VBATT CN3.VUSB CN5.B CN6.B CN7.B CN8.B FID8_1.1 FID8_1_1_1.1 FID10_1_2.1 FID10_1_2_1.1 IC2.8 IC2.10 IC2.11 IC2.13 IC2.15 IC2.16 IC2.18 IC2.22 IC2.23 IC2.27 IC2.28 IC2.32 IC2.33 IC2.36 IC2.37 IC2.38 IC2.40 IC2.B IC7.5 IC7.6 IC7.7 IC7.8 IC7.9 IC7.12 IC7.13 IC7.14 PW1.1 PW1.12 SN1.0 SN2.0 SN3.0 SN4.0 SN5.0 SN6.0 TOOLHOLE1_1.TOOL TOOLHOLE1_1_1_1.TOOL TOOLHOLE5_1_2.TOOL1 TOOLHOLE5_1_2_1.TOOL1

## Polygon pours and split planes (outlines as drawn)
DGND on Top Layer "Bottom Layer-No Net" (solid, remove dead copper, pour order 5): 7.6,155.7 8,156.1 113.2,156.1 113.2,87.3 113,87.1 111.2,85.3 110.5,85.3 89.4,85.3 89.3,85.4 87.9,84 87.9,83.9 87.9,6 85.9,4 85.3,3.4 80.8,3.4 6.5,3.4 5,4.9 3.3,6.6 -1,6.6 -3.3,6.6 -4.3,7.6 -4.7,8 -4.7,10.1 -4.7,131.9 -3.7,132.9 -3.3,133.3 -1.2,133.3 2.7,133.3 5.1,135.7 6.3,136.9 6.3,140.6 6.3,154.3 8.1,156.1
DGND on Bottom Layer "Bottom Layer-No Net" (solid, remove dead copper, pour order 4): 7.6,155.7 8,156.1 113.2,156.1 113.2,87.3 113,87.1 111.2,85.3 110.5,85.3 89.4,85.3 89.3,85.4 87.9,84 87.9,83.9 87.9,6 85.9,4 85.3,3.4 80.8,3.4 6.5,3.4 5,4.9 3.3,6.6 -1,6.6 -3.3,6.6 -4.3,7.6 -4.7,8 -4.7,10.1 -4.7,131.9 -3.7,132.9 -3.3,133.3 -1.2,133.3 2.7,133.3 5.1,135.7 6.3,136.9 6.3,140.6 6.3,154.3 8.1,156.1
DGND on Mid-Layer 1 "Bottom Layer-No Net" (solid, remove dead copper, pour order 6): 77.2,156.2 110.7,156.2 112.8,154.1 113.6,153.3 113.6,89.9 113.6,88.9 110.1,85.4 109.9,85.6 77.1,85.6
DGND on Internal Plane 1 (split plane): 127.49,-3.49 -10.49,-3.49 -10.49,161.49 127.49,161.49

## Keep-outs
Keep-Out Layer:
  lines w0.5: -3,8.305 0.5,8.305 cw(c0.5,1.152) 6.529,5 84,5 ccw(c84,8) 87,8 87,84 cw(c90,84) 90,87 109,87 ccw(c109,90) 112,90 112,152 ccw(c109,152) 109,155 8.252,155 8.252,152.652 cw(c-1,152.652) 7.652,149.375 7.652,139.152 cw(c0.5,139.152) 0.5,132 -3,132 -3,8.305

## Other copper
Top Layer:
  text "rLoop - Core Node, Rev 1.0" at 6.1,-1.6 h3

## Silkscreen, mask and mechanical layers (free items; w line width, h text height)
Top Overlay:
  text "P5V" at 83.405,147.5 h1.2
  text "DC A" at 21.6,140.4 h1.2 r90
  text "DC B" at 36.1,140.405 h1.2 r90
  text "P24V" at 18.7,112.905 h1.2 r90
  text "DGND" at 25.4,107.4 h1.2
  text "D3V3" at 94.9,87.705 h1.2 r90
  text "PI 3V3" at 86.1,29.7 h1.2 r90
  text "PROG" at 48.6,25.405 h1.2
  text "Core Node" at 63.6,15.9 h2
  text "Rev. 1.0" at 63.5,14.1 h2
  text "S/N:" at 63.5,9.5 h2
  text "TEENSY 3V3" at 16.3,7.305 h1.2
Mechanical 1:
  lines w0.1: 112,90 112,152 ; -11,-4 -11,162 128,162 128,-4 -11,-4
  lines w0.127: 112,90 cw(c109,90) 109,87 90,87 ccw(c90,84) 87,84 87,8 cw(c84,8) 84,5 6.53,5 ccw(c0.5,1.152) 0.5,8.305 -3,8.305 -3,132 0.5,132 ccw(c0.5,139.152) 7.652,139.152 7.652,149.375 ccw(c-1,152.652) 8.252,152.652 8.252,155 109,155 cw(c109,152) 112,152
Mechanical 3:
  lines w2.4: -4.2,7.105 0.5,7.105 ; -4.2,7.2 -4.2,28.8 ; -4.2,36 -4.2,102 ; -4.2,109.2 -4.2,133.2 0.5,133.2 ; 0.5,7.104 cw(c0.5,1.152) 5.85,3.761 ; 0.5,133.2 ccw(c0.5,139.152) 6.452,139.152 6.452,149.575 ; 5.9,3.9 6,3.8 43.2,3.8 ; 6.53,149.799 ccw(c-1.005,152.653) 7.052,152.653 7.052,156.2 37.052,156.2 ; 43.052,156.2 109,156.2 cw(c109,152) 113.2,152 113.2,116 ; 50.4,3.8 84,3.8 ccw(c84,8) 88.2,8 88.2,20 ; 88.2,27.2 88.2,84 cw(c90,84) 90,85.8 109,85.8 ccw(c109,90) 113.2,90 113.2,108.8

## Text inside footprints (layer, text, board x,y; h text height)
LBL1: Top Overlay "STATIC SENSITIVE" at 57.026,121.104 h2
LBL2: Top Overlay "rloop.org" at 69.35,18.705 h1